# Allegro board ex_rlc.brd
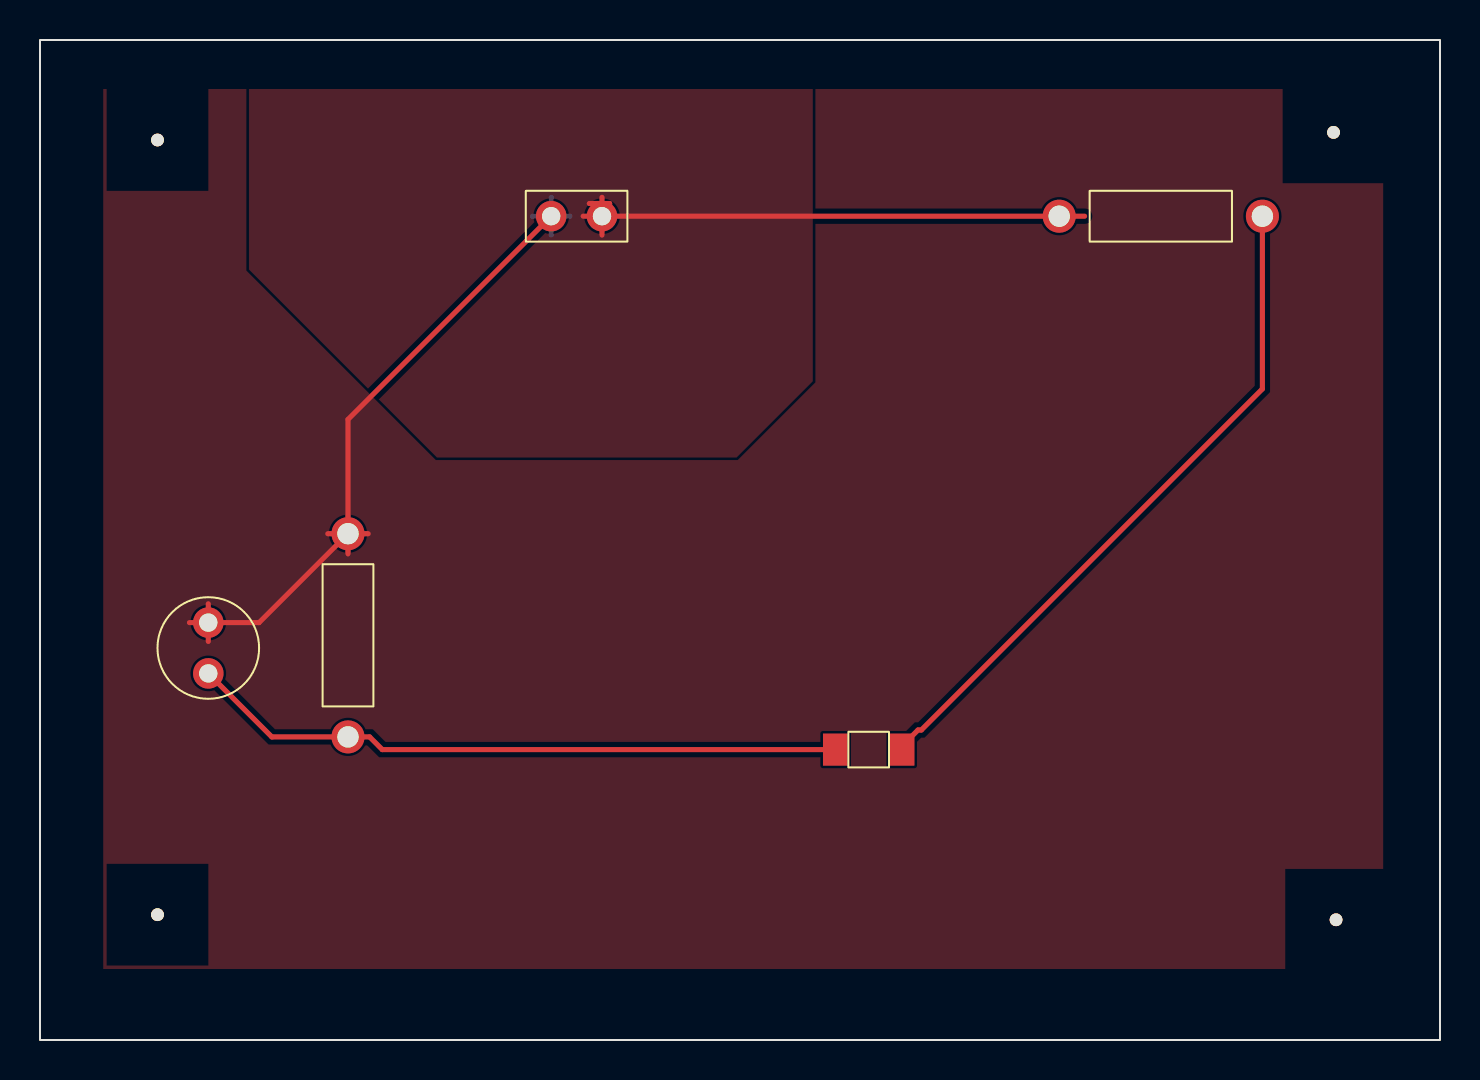
[diagram p0: board, top side]
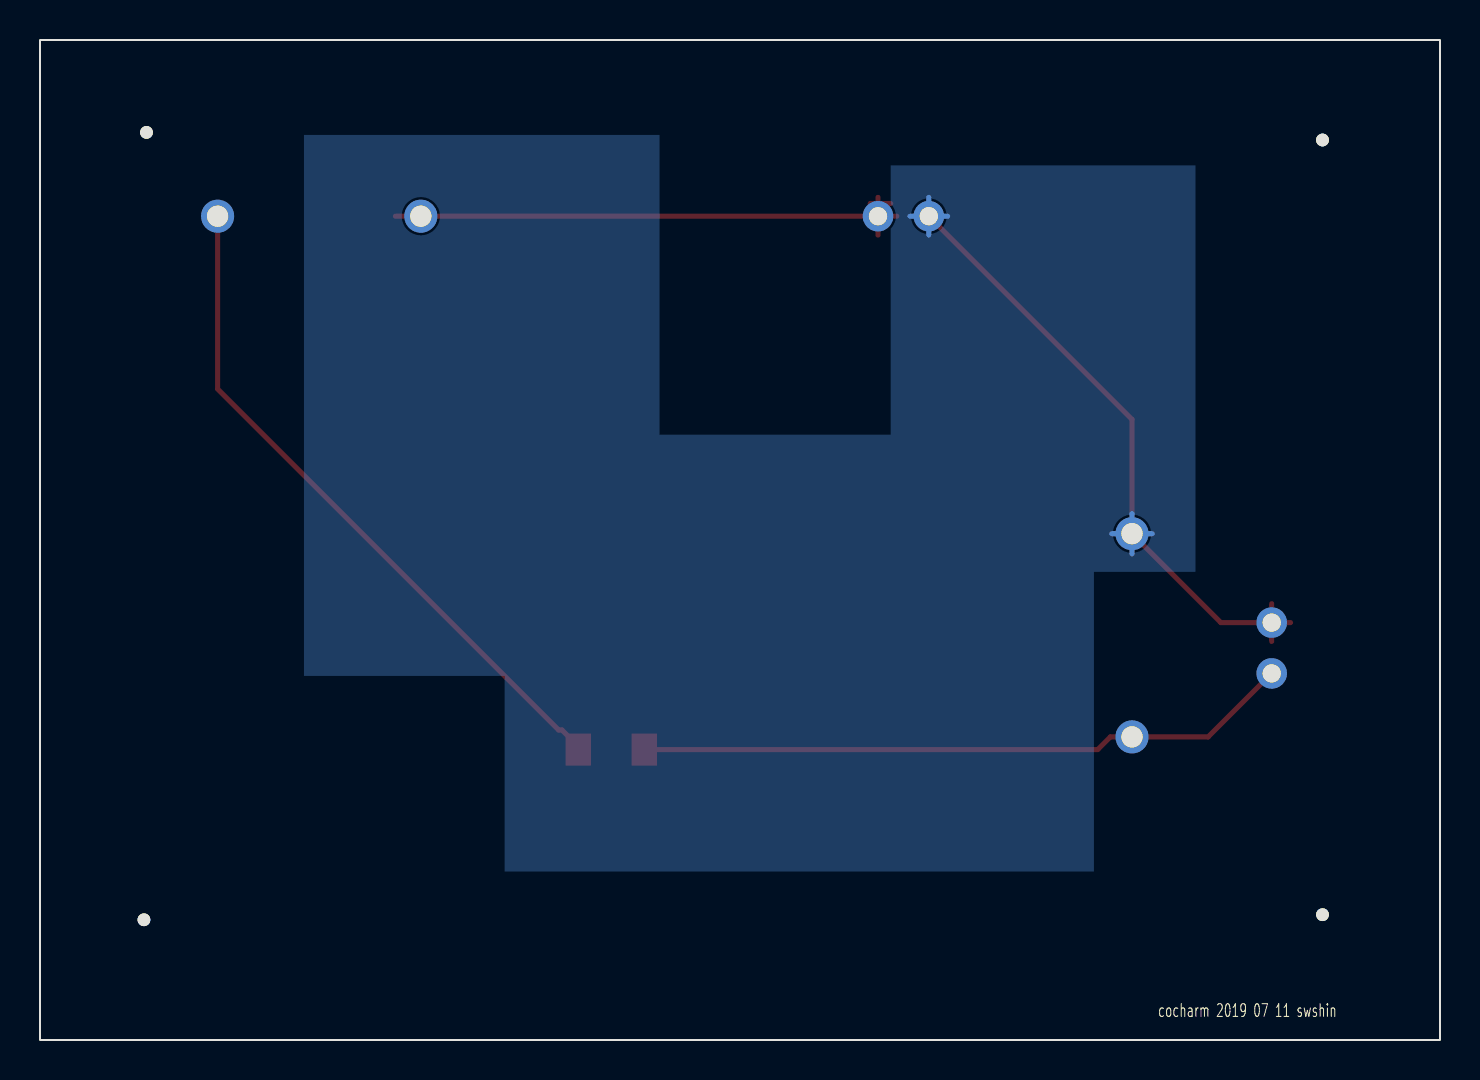
[diagram p1: board, bottom side, seen from below]

Outline 70 x 50 mm; copper layers: TOP, BOTTOM. Coordinates in mm from the lower left corner of the outline.
Outline path: rectangle 0,0 70,50

## Design rules (mm)
constraint set DEFAULT: min track width 0.254
net group BASENETS: nets KKK N00144

## Placement (name value [footprint] x y rotation side)
C1  1u  [CAP196]  8.41 20.87 180 top
J1  CON2  [JUMPER2]  28.1 41.19 180 top
L1  100n  [SMDRES]  41.44 14.52 180 top
NOREF  -  [unnamed]  5.88 6.27 0 top
NOREF#2  -  [unnamed]  64.68 45.38 0 top
NOREF#3  -  [unnamed]  64.8 6.01 0 top
NOREF#4  -  [unnamed]  5.88 45 0 top
R1  330  [RES400]  50.96 41.19 270 top
R2  330  [RES400]  15.4 15.16 0 top

## Library data of the parts
C1 = CAP NP: Tolerance: ***; User Part Number: ***
J1 = CON2: User Part Number: ***
L1 = INDUCTOR: Tolerance: ***; User Part Number: ***
R1 R2 = R: Tolerance: ***; User Part Number: ***

## Footprints (pads in the part's own frame, mm; a bottom-side part is the same pattern mirrored in y, then rotated)
CAP196
  round 1.524 hole 0.914: 1(0,0) 2(0,2.54)
JUMPER2
  round 1.524 hole 0.914: 1(0,0) 2(2.54,0)
RES400
  round 1.651 hole 1.067: 1(0,0) 2(0,10.16)
SMDRES
  rect 1.27x1.6 smd: 1(-1.651,0) 2(1.651,0)
unnamed
  round 0.635 hole 3.175 unplated: (0,0)

## Nets
GND: C1.1 J1.2 R2.2
VCC: J1.1 R1.1
KKK: L1.1 R1.2
N00144: C1.2 L1.2 R2.1

## Routing (per net, layer and track width the routed paths; a pad name or vN(x,y) marks a point on that pad's centre or on a via; arc(x,y) is an arc through that point)
GND: length 42.5
  TOP w0.254: 14.39,25.32 R2.2 ; R2.2 15.4,24.31 ; R2.2 15.4,31.03 J1.2 ; R2.2 10.95,20.87 C1.1 ; R2.2 16.41,25.32 ; C1.1 8.41,21.81 ; C1.1 8.41,19.93 ; C1.1 7.47,20.87
  BOTTOM w0.254: J1.2 26.5,41.19 ; J1.2 24.62,41.19 ; J1.2 25.56,40.25 ; J1.2 25.56,42.13 ; 15.4,24.31 R2.2 ; R2.2 14.39,25.32 ; R2.2 15.4,26.32 ; R2.2 16.41,25.32
VCC: length 28.2
  TOP w0.254: 28.1,40.25 J1.1 ; J1.1 28.1,42.13 ; J1.1 27.16,41.19 ; 52.23,41.19 R1.1 28.48,41.19 28.48,41.82 27.47,41.82
KKK: length 34.2
  TOP w0.254: R1.2 61.12,32.55 44.07,15.5 43.9,15.5 43.09,14.69 L1.1
N00144: length 32.9
  TOP w0.254: L1.2 17.12,14.52 16.48,15.16 R2.1 11.59,15.16 C1.2

## Copper pours and planes (outline as drawn; the poured copper is in the pictures)
GND on TOP: 3.16,47.55 67.16,47.55 67.16,3.55 3.16,3.55
GND on BOTTOM: 39.02,45.25 56.8,45.25 56.8,18.2 46.77,18.2 46.77,8.42 17.31,8.42 17.31,23.41 12.22,23.41 12.22,43.73 27.47,43.73 27.47,30.27 39.02,30.27
VCC on TOP: 10.45,47.55 38.64,47.55 38.64,32.93 34.83,29.13 19.84,29.13 10.45,38.52

## Text on the board
Ref Des/Silkscreen Bottom: cocharm 2019 07 11 swshin
TOLERANCE_TOP: FIGURE | FINISHED_SIZE | 0.914 | 1.067 | 3.175 | DRILL CHART: TOP to BOTTOM | ALL UNITS ARE IN MILLIMETERS | PLATED | NON-PLATED | QTY | 4
